# EAGLE board pcbqr_v4 (EAGLE 5.11)
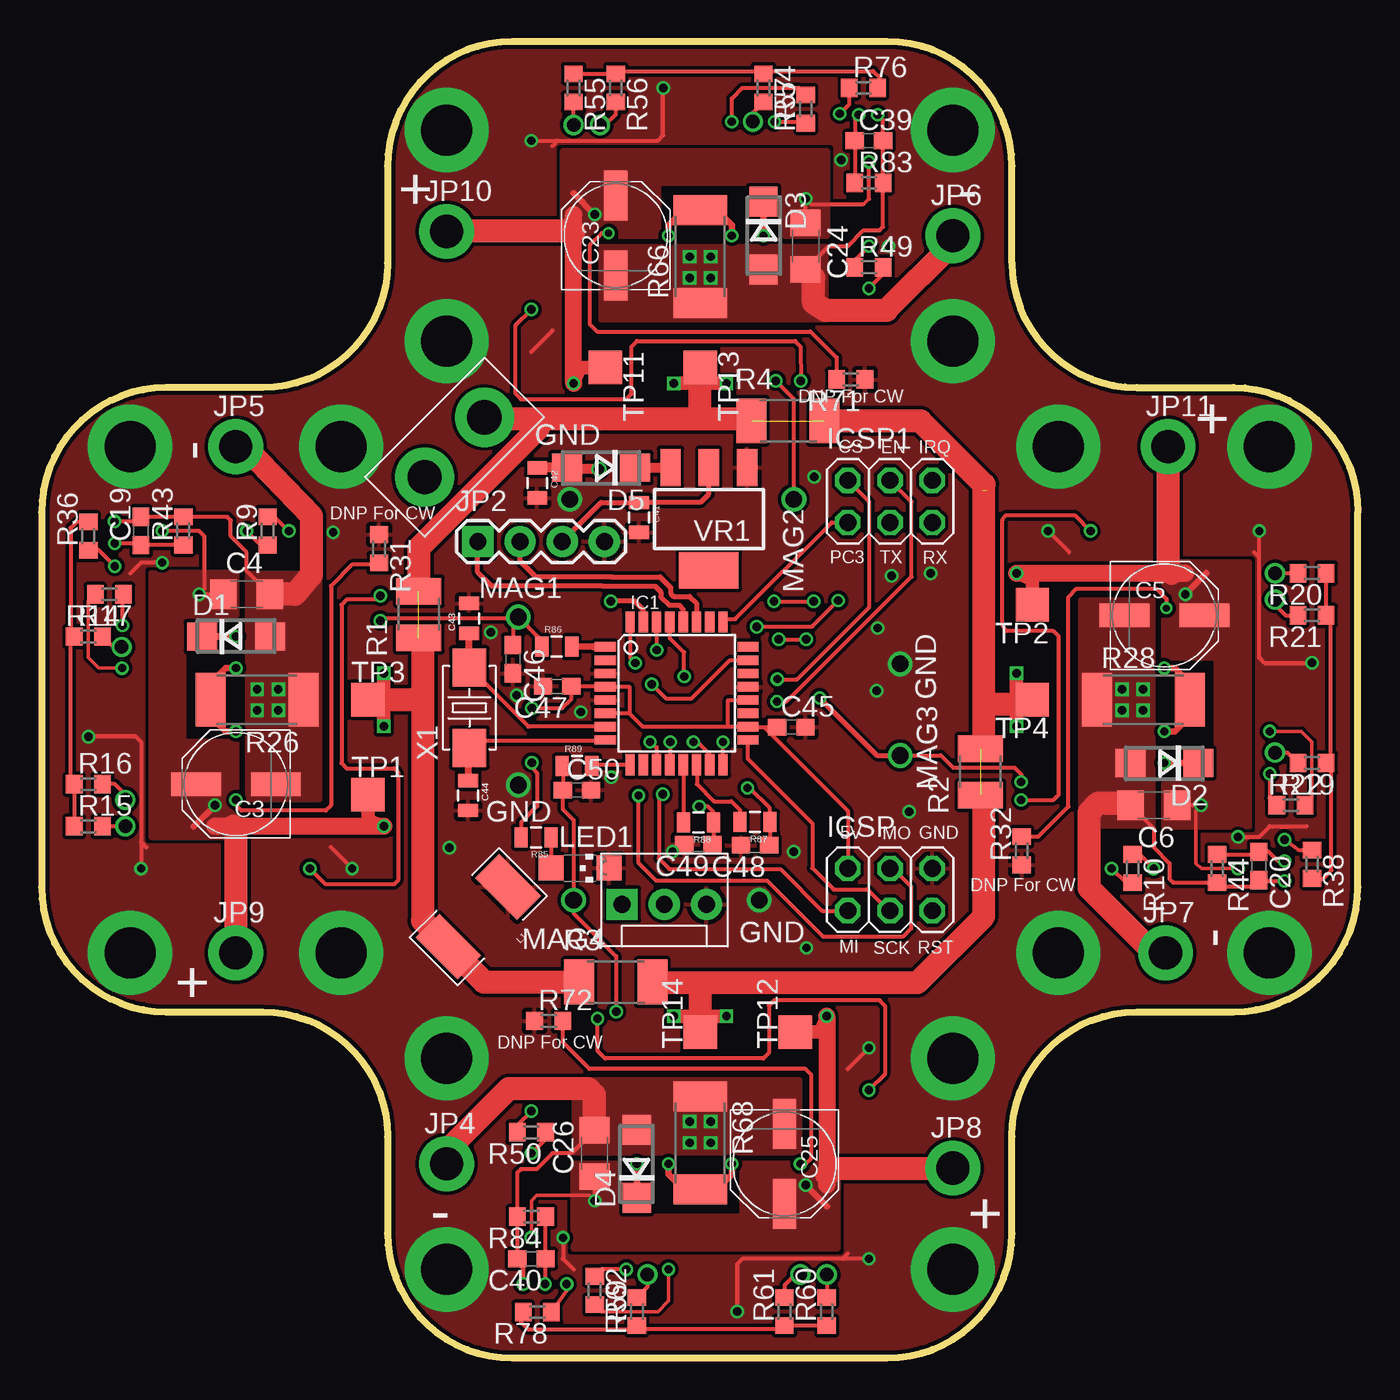
[diagram p0: board, top side]
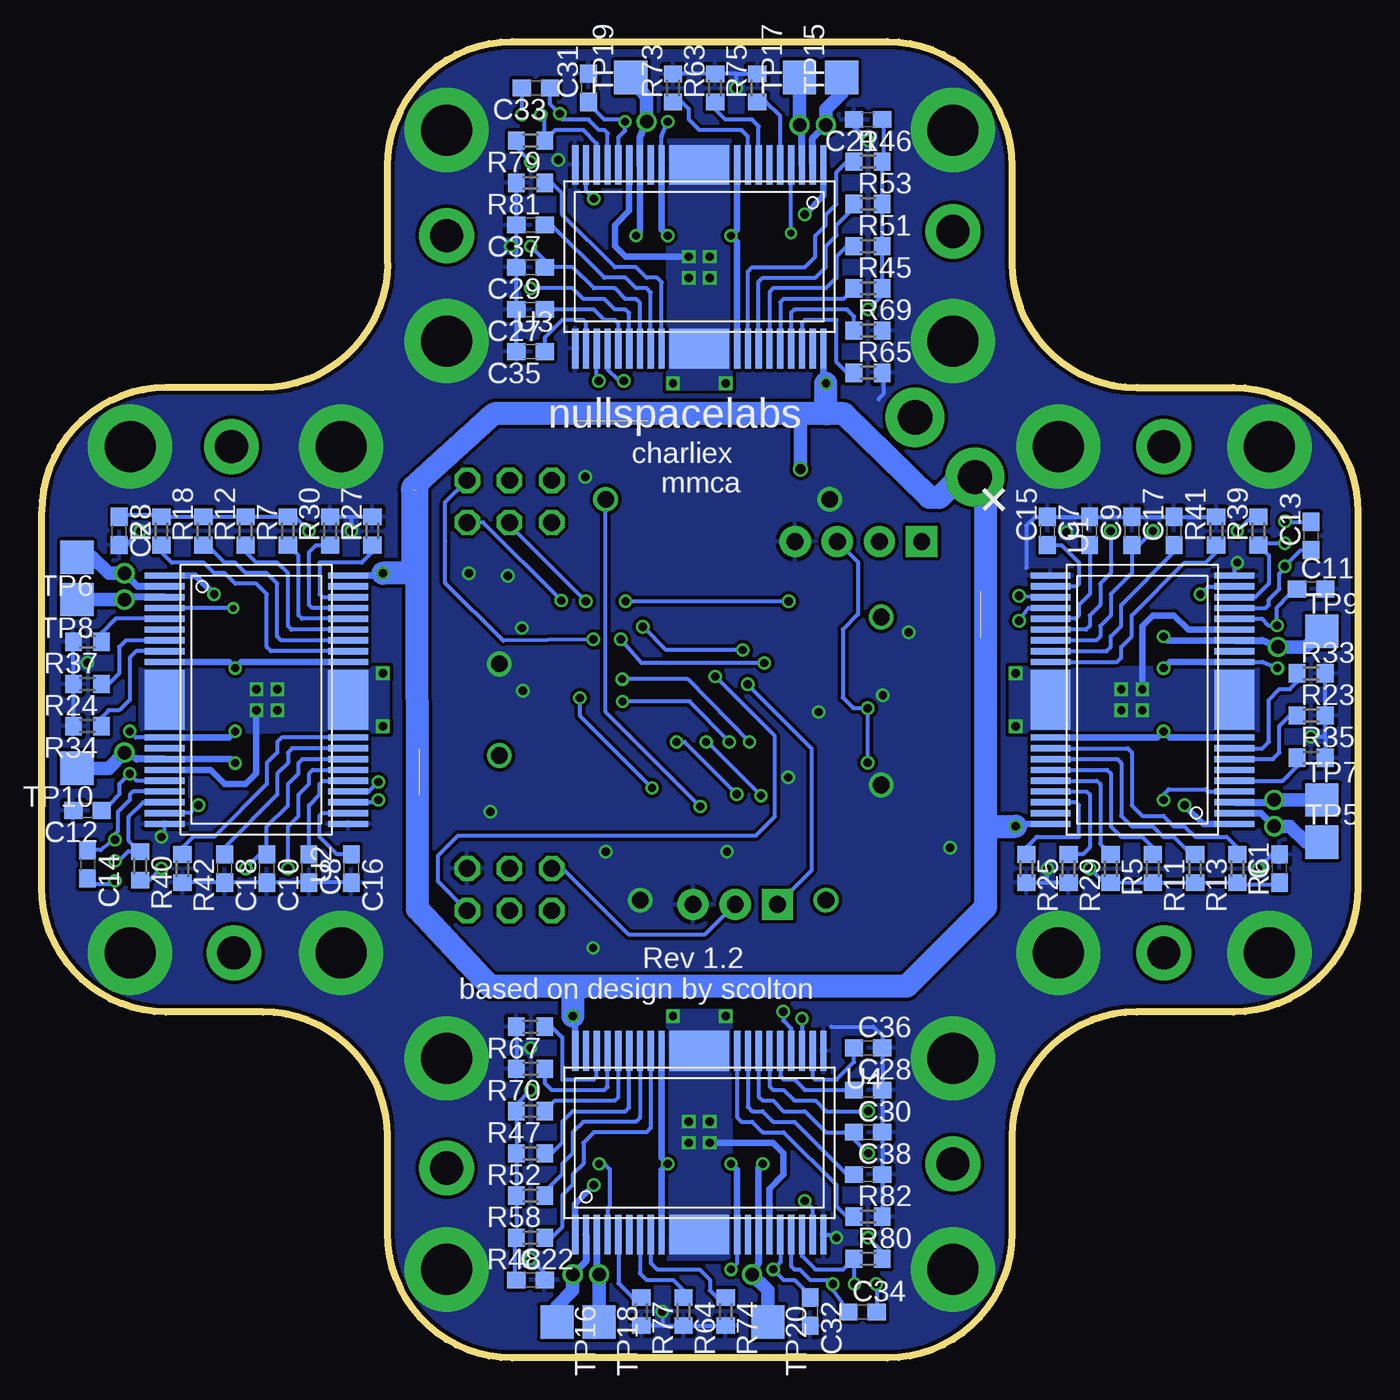
[diagram p1: board, bottom side, seen from below]

Size 79.25 x 79.25 mm. Coordinates in mm from the lower left corner, seen from the top.
Outline: 58.42,65.92 arc90 65.92,58.42 71.75,58.42 arc-90 79.25,50.92 79.25,28.33 arc-90 71.75,20.83 65.92,20.83 arc90 58.42,13.33 58.42,7.5 arc-90 50.92,0 28.33,0 arc-90 20.83,7.5 20.83,13.33 arc90 13.33,20.83 7.5,20.83 arc-90 0,28.33 0,50.92 arc-90 7.5,58.42 13.33,58.42 arc90 20.83,65.92 20.83,71.75 arc-90 28.33,79.25 50.92,79.25 arc-90 58.42,71.75 58.42,65.92
Copper layers (1*16): Top 0.035mm / dielectric 1.5mm / Bottom 0.035mm
Design rules "ITead_rule *": minimum track width 6mil, minimum drill 12mil, track to track 6mil, track to pad 6mil, pad to pad 6mil, via to via 6mil, smd to smd 0mil, copper to edge 10mil, drill to drill 10mil, minimum pad ring 10mil, minimum via ring 6mil, stop-mask expansion 2mil, vias tented up to drill 25mil, thermal gap 10mil
Net classes: 0 default: width 0.203 mm, drill 0.381 mm, clearance 0.203 mm; 1 power: width 0.254 mm, drill 0.381 mm, clearance 0.203 mm; 3 usbvcc: width 0.508 mm, drill 0.381 mm, clearance 0.203 mm

## Footprints (pad centres in the part's own frame; a part is rotated, then mirrored left to right if it is on the bottom)
C0603 = smd 1.1 x 1: 1 -0.85,0; 2 0.85,0
PANASONIC_D = smd 3 x 1.4: + 2.4,0; - -2.4,0
C1206 = smd 1.6 x 1.8: 1 -1.4,0; 2 1.4,0
0805 = smd 0.8 x 1.2: 1 -0.9,0; 2 0.9,0
SMA = smd 1.8 x 1.7: A 2.05,0; C -2.05,0
TQFP32-08 = smd 1.27 x 0.559: 1 -4.293,2.8; 2 -4.293,2; 3 -4.293,1.2; 4 -4.293,0.4; 5 -4.293,-0.4; 6 -4.293,-1.2; 7 -4.293,-2; 8 -4.293,-2.8; 17 4.293,-2.8; 18 4.293,-2; 19 4.293,-1.2; 20 4.293,-0.4; 21 4.293,0.4; 22 4.293,1.2; 23 4.293,2; 24 4.293,2.8 | smd 0.559 x 1.27: 9 -2.8,-4.293; 10 -2,-4.293; 11 -1.2,-4.293; 12 -0.4,-4.293; 13 0.4,-4.293; 14 1.2,-4.293; 15 2,-4.293; 16 2.8,-4.293; 25 2.8,4.293; 26 2,4.293; 27 1.2,4.293; 28 0.4,4.293; 29 -0.4,4.293; 30 -1.2,4.293; 31 -2,4.293; 32 -2.8,4.293
2X03 = drill 1.016 octagon: 1 -2.54,-1.27; 2 -2.54,1.27; 3 0,-1.27; 4 0,1.27; 5 2.54,-1.27; 6 2.54,1.27
1X04 = drill 1.016 pad 1.88 square: 1 0,0 | drill 1.016 pad 1.88 round: 2 2.54,0; 3 5.08,0; 4 7.62,0
MOLEX-1X3 = drill 1.016 pad 1.88 square: 1 0,0 | drill 1.016 pad 1.88 round: 2 2.54,0; 3 5.08,0
1X01_2MM = drill 2 pad 3.302 round: 1 0,0
1X02_XTRA_BIG = drill 2.057 pad 3.556 round: 1 -2.54,0; 2 2.54,0
INDUCTOR-1206 = smd 2.032 x 3.556: P$1 -2.54,0; P$2 2.54,0
CHIPLED_1206 = smd 1.5 x 1.5: A 0,-1.75; C 0,1.75
R1210 = smd 1.6 x 2.7: 1 -1.4,0; 2 1.4,0
R2010 = smd 1.8 x 2.7: 1 -2.2,0; 2 2.2,0
R0603 = smd 1 x 1.1: 1 -0.85,0; 2 0.85,0
R2512 = smd 1.8 x 3.2: 1 -2.8,0; 2 2.8,0
TP20SQ = smd 2 x 2: TP 0,0
HSOP36-P-450-0.65 = smd 0.38 x 2.4: 1 -7.475,-5.525; 2 -6.825,-5.525; 3 -6.175,-5.525; 4 -5.525,-5.525; 5 -4.875,-5.525; 6 -4.225,-5.525; 7 -3.575,-5.525; 8 -2.925,-5.525; 9 -2.275,-5.525; 10 2.275,-5.525; 11 2.925,-5.525; 12 3.575,-5.525; 13 4.225,-5.525; 14 4.875,-5.525; 15 5.525,-5.525; 16 6.175,-5.525; 17 6.825,-5.525; 18 7.475,-5.525; 19 7.475,5.525; 20 6.825,5.525; 21 6.175,5.525; 22 5.525,5.525; 23 4.875,5.525; 24 4.225,5.525; 25 3.575,5.525; 26 2.925,5.525; 27 2.275,5.525; 28 -2.275,5.525; 29 -2.925,5.525; 30 -3.575,5.525; 31 -4.225,5.525; 32 -4.875,5.525; 33 -5.525,5.525; 34 -6.175,5.525; 35 -6.825,5.525; 36 -7.475,5.525 | smd 3.6 x 2.4: P1 0,-5.525; P2 0,5.525
SOT-223 = smd 1.219 x 2.235: 1 -2.311,-3.099; 2 0,-3.099; 3 2.311,-3.099 | smd 3.6 x 2.2: 4 0,3.099
5032 = smd 2.286 x 2.032: 1 -2.413,0; 2 2.413,0

## Placement (x,y rotation side)
C1  1uF  [C0603]  4.72,29.46 90 bottom
C2  1uF  [C0603]  74.57,49.78 270 bottom
C3  68uF  [PANASONIC_D]  11.71,34.54 180 top
C4  10uF  [C1206]  12.34,45.97 0 top
C5  68uF  [PANASONIC_D]  67.59,44.7 0 top
C6  10uF  [C1206]  66.95,33.27 180 top
C7  0.1uF  [C0603]  16.15,49.78 90 bottom
C8  0.1uF  [C0603]  63.14,29.46 270 bottom
C9  1uF  [C0603]  13.61,49.78 90 bottom
C10  1uF  [C0603]  65.68,29.46 270 bottom
C11  0.1uF  [C0603]  2.82,46.29 0 bottom
C12  0.1uF  [C0603]  76.48,32.96 180 bottom
C13  DNP  [C0603]  2.82,49.48 90 bottom
C14  DNP  [C0603]  76.48,29.72 270 bottom
C15  DNP  [C0603]  18.69,49.78 90 bottom
C16  DNP  [C0603]  60.6,29.46 270 bottom
C17  100pF  [C0603]  11.07,49.78 90 bottom
C18  100pF  [C0603]  68.22,29.46 270 bottom
C19  0.1uF  [C0603]  5.99,49.78 90 top
C20  0.1uF  [C0603]  73.28,29.62 270 top
C21  1uF  [C0603]  29.49,74.55 180 bottom
C22  1uF  [C0603]  49.81,4.7 0 bottom
C23  68uF  [PANASONIC_D]  34.57,67.56 90 top
C24  10uF  [C1206]  46,66.93 270 top
C25  68uF  [PANASONIC_D]  44.73,11.68 270 top
C26  10uF  [C1206]  33.3,12.32 90 top
C27  0.1uF  [C0603]  49.81,63.12 180 bottom
C28  0.1uF  [C0603]  29.49,16.13 0 bottom
C29  1uF  [C0603]  49.81,65.66 180 bottom
C30  1uF  [C0603]  29.49,13.59 0 bottom
C31  0.1uF  [C0603]  46.32,76.45 90 bottom
C32  0.1uF  [C0603]  32.98,2.79 270 bottom
C33  DNP  [C0603]  49.48,76.45 180 bottom
C34  DNP  [C0603]  29.82,2.77 0 bottom
C35  DNP  [C0603]  49.81,60.58 180 bottom
C36  DNP  [C0603]  29.49,18.67 0 bottom
C37  100pF  [C0603]  49.81,68.2 180 bottom
C38  100pF  [C0603]  29.49,11.05 0 bottom
C39  0.1uF  [C0603]  49.81,73.28 0 top
C40  0.1uF  [C0603]  29.49,5.97 180 top
C41  10uF  [0805]  35.98,50.6 270 top
C42  10uF  [0805]  29.85,52.68 270 top
C43  18pF  [0805]  25.73,44.53 90 top
C44  18pF  [0805]  25.68,33.86 270 top
C45  0.1uF  [C0603]  45.14,37.97 0 top
C46  2.2uF  [C0603]  28.37,42.06 270 top
C47  0.1uF  [C0603]  31.04,40.44 180 top
C48  2.2uF  [C0603]  42.95,30.86 180 top
C49  2.2uF  [C0603]  39.55,30.91 180 top
C50  2.2uF  [C0603]  32.23,34.19 0 top
D1  SCHOTTKY_SMA  [SMA]  11.71,43.43 0 top
D2  SCHOTTKY_SMA  [SMA]  67.59,35.81 180 top
D3  SCHOTTKY_SMA  [SMA]  43.46,67.56 270 top
D4  SCHOTTKY_SMA  [SMA]  35.84,11.68 90 top
D5  SCHOTTKY_SMA  [SMA]  33.68,53.59 180 top
IC1  MEGA8-AI  [TQFP32-08]  38.23,40.01 0 top
ICSP  ICSP  [2X03]  51.08,28.19 0 top
ICSP1  ICSP  [2X03]  51.08,51.56 0 top
JP2  IMU  [1X04]  26.26,49.15 0 top
JP3  range  [MOLEX-1X3]  34.95,27.3 0 top
JP4  M01PTH_2MM  [1X01_2MM]  24.38,11.68 0 top
JP5  M01PTH_2MM  [1X01_2MM]  11.68,54.86 0 top
JP6  M01PTH_2MM  [1X01_2MM]  54.86,67.56 0 top
JP7  M01PTH_2MM  [1X01_2MM]  67.67,24.38 0 top
JP8  M01PTH_2MM  [1X01_2MM]  54.86,11.43 0 top
JP9  M01PTH_2MM  [1X01_2MM]  11.68,24.38 0 top
JP10  M01PTH_2MM  [1X01_2MM]  24.38,67.82 0 top
JP11  M01PTH_2MM  [1X01_2MM]  67.82,54.86 0 top
JP12  [1X02_XTRA_BIG]  24.86,54.83 225 top
L1  HF70ACC321611-T  [INDUCTOR-1206]  26.29,26.56 225 top
LED1  [CHIPLED_1206]  32.41,29.49 270 top
R1  0R  [R1210]  22.71,44.75 90 top
R2  0R  [R1210]  56.52,35.28 90 top
R3  0R  [R2010]  34.57,22.63 0 top
R4  0R  [R2010]  44.93,56.41 0 top
R5  DNP  [R0603]  14.88,29.46 270 bottom
R6  10k  [R0603]  7.26,29.46 270 bottom
R7  DNP  [R0603]  64.41,49.78 90 bottom
R8  10k  [R0603]  72.03,49.78 90 bottom
R9  240k  [R0603]  13.61,49.78 90 top
R10  240k  [R0603]  65.68,29.46 270 top
R11  0  [R0603]  12.34,29.46 270 bottom
R12  0  [R0603]  66.95,49.78 90 bottom
R13  0  [R0603]  9.8,29.46 270 bottom
R14  10k  [R0603]  4.09,45.97 180 top
R15  10k  [R0603]  2.82,32 0 top
R16  10k  [R0603]  2.82,34.54 0 top
R17  10k  [R0603]  2.82,43.43 0 top
R18  0  [R0603]  69.49,49.78 90 bottom
R19  10k  [R0603]  75.21,33.27 0 top
R20  10k  [R0603]  76.48,47.24 180 top
R21  10k  [R0603]  76.48,44.7 180 top
R22  10k  [R0603]  76.48,35.81 180 top
R23  DNP  [R0603]  2.82,38.67 0 bottom
R24  DNP  [R0603]  76.48,40.58 180 bottom
R25  0  [R0603]  19.96,29.46 270 bottom
R26  0.2, 2W  [R2512]  12.98,39.62 180 top
R27  0  [R0603]  59.33,49.78 90 bottom
R28  0.2, 2W  [R2512]  66.32,39.62 0 top
R29  0  [R0603]  17.42,29.46 270 bottom
R30  0  [R0603]  61.87,49.78 90 bottom
R31  0  [R0603]  20.32,48.72 270 top
R32  0  [R0603]  59,30.53 90 top
R33  DNP  [R0603]  2.82,41.21 0 bottom
R34  DNP  [R0603]  76.48,38.04 180 bottom
R35  0  [R0603]  2.82,36.13 0 bottom
R36  0  [R0603]  2.82,49.48 90 top
R37  0  [R0603]  76.48,43.12 180 bottom
R38  0  [R0603]  76.48,29.72 270 top
R39  10k  [R0603]  5.99,49.78 90 bottom
R40  10k  [R0603]  73.3,29.62 270 bottom
R41  10k  [R0603]  8.53,49.78 90 bottom
R42  10k  [R0603]  70.76,29.46 270 bottom
R43  10k  [R0603]  8.53,49.78 90 top
R44  10k  [R0603]  70.76,29.46 270 top
R45  DNP  [R0603]  29.49,64.39 0 bottom
R46  10k  [R0603]  29.49,72.01 0 bottom
R47  DNP  [R0603]  49.81,14.86 180 bottom
R48  10k  [R0603]  49.81,7.24 180 bottom
R49  240k  [R0603]  49.81,65.66 0 top
R50  240k  [R0603]  29.49,13.59 180 top
R51  0  [R0603]  29.49,66.93 0 bottom
R52  0  [R0603]  49.81,12.32 180 bottom
R53  0  [R0603]  29.49,69.47 0 bottom
R54  10k  [R0603]  46,75.18 90 top
R55  10k  [R0603]  32.03,76.45 270 top
R56  10k  [R0603]  34.57,76.45 270 top
R57  10k  [R0603]  43.46,76.45 270 top
R58  0  [R0603]  49.81,9.78 180 bottom
R59  10k  [R0603]  33.3,4.06 270 top
R60  10k  [R0603]  47.27,2.79 90 top
R61  10k  [R0603]  44.73,2.79 90 top
R62  10k  [R0603]  35.84,2.79 90 top
R63  DNP  [R0603]  38.7,76.45 90 bottom
R64  DNP  [R0603]  40.6,2.79 270 bottom
R65  0  [R0603]  29.49,59.31 0 bottom
R66  0.2, 2W  [R2512]  39.65,66.29 90 top
R67  0  [R0603]  49.81,19.94 180 bottom
R68  0.2, 2W  [R2512]  39.65,12.95 270 top
R69  0  [R0603]  29.49,61.85 0 bottom
R70  0  [R0603]  49.81,17.4 180 bottom
R71  0  [R0603]  48.72,58.9 180 top
R72  0  [R0603]  30.53,20.29 0 top
R73  DNP  [R0603]  41.24,76.45 90 bottom
R74  DNP  [R0603]  38.06,2.79 270 bottom
R75  0  [R0603]  36.16,76.45 90 bottom
R76  0  [R0603]  49.48,76.45 0 top
R77  0  [R0603]  43.14,2.79 270 bottom
R78  0  [R0603]  29.85,2.77 180 top
R79  10k  [R0603]  49.81,73.28 180 bottom
R80  10k  [R0603]  29.49,5.97 0 bottom
R81  10k  [R0603]  49.81,70.74 180 bottom
R82  10k  [R0603]  29.49,8.51 0 bottom
R83  10k  [R0603]  49.81,70.74 0 top
R84  10k  [R0603]  29.49,8.51 180 top
R85  [0805]  29.77,31.34 180 top
R86  3k  [0805]  31.01,42.82 0 top
R87  3k  [0805]  42.95,32.26 180 top
R88  3k  [0805]  39.55,32.23 180 top
R89  3k  [0805]  32.23,35.64 0 top
TP1  TPTP20SQ  [TP20SQ]  19.65,33.91 0 top
TP2  TPTP20SQ  [TP20SQ]  59.65,45.34 180 top
TP3  TPTP20SQ  [TP20SQ]  19.65,39.62 0 top
TP4  TPTP20SQ  [TP20SQ]  59.65,39.62 180 top
TP5  TPTP20SQ  [TP20SQ]  2.18,31.05 0 bottom
TP6  TPTP20SQ  [TP20SQ]  77.11,48.2 180 bottom
TP7  TPTP20SQ  [TP20SQ]  2.18,33.59 0 bottom
TP8  TPTP20SQ  [TP20SQ]  77.11,45.66 180 bottom
TP9  TPTP20SQ  [TP20SQ]  2.18,43.75 0 bottom
TP10  TPTP20SQ  [TP20SQ]  77.11,35.5 180 bottom
TP11  TPTP20SQ  [TP20SQ]  33.93,59.63 270 top
TP12  TPTP20SQ  [TP20SQ]  45.36,19.62 90 top
TP13  TPTP20SQ  [TP20SQ]  39.65,59.63 270 top
TP14  TPTP20SQ  [TP20SQ]  39.65,19.62 90 top
TP15  TPTP20SQ  [TP20SQ]  31.08,77.09 90 bottom
TP16  TPTP20SQ  [TP20SQ]  48.22,2.16 270 bottom
TP17  TPTP20SQ  [TP20SQ]  33.62,77.09 90 bottom
TP18  TPTP20SQ  [TP20SQ]  45.68,2.16 270 bottom
TP19  TPTP20SQ  [TP20SQ]  43.78,77.09 90 bottom
TP20  TPTP20SQ  [TP20SQ]  35.52,2.16 270 bottom
U1  TB6588FG  [HSOP36-P-450-0.65]  12.98,39.62 90 bottom
U2  TB6588FG  [HSOP36-P-450-0.65]  66.32,39.62 270 bottom
U3  TB6588FG  [HSOP36-P-450-0.65]  39.65,66.29 180 bottom
U4  TB6588FG  [HSOP36-P-450-0.65]  39.65,12.95 0 bottom
VR1  NCP1117ST50T3G  [SOT-223]  40.17,50.51 180 top
X1  16Mhz  [5032]  25.76,39.14 90 top

## Library data of the parts
C1-C40 C45-C50 R1-R84 = rcl
C41 C42 JP2-JP12 L1 R85-R89 = SparkFun
C43 C44 = slice_noshift
D1-D5 U1-U4 VR1 = sc_usercreated
IC1 = atmel; MPN: ATMEGA8-16AU; OC_FARNELL: 9171371; OC_NEWARK: 73M8863
ICSP ICSP1 = pinhead
LED1 = led
TP1-TP20 = testpad
X1 = NSL_MiniQuad

## Nets
5V: C41.1 C45.1 C47.1 IC1.4 IC1.6 IC1.18 IC1.20 ICSP.2 JP2.3 JP3.2 R85.2 VR1.2
CS: IC1.11 ICSP1.2
DIR1: R31.2 U1.4
DIR2: R71.2 U3.4
DIR3: R32.2 U2.4
DIR4: R72.2 U4.4
GND: C1.2 C2.2 C7.2 C8.2 C9.2 C10.2 C11.2 C12.2 C15.2 C16.2 C17.2 C18.2 C21.2 C22.2 C27.2 C28.2 C29.2 C30.2 C31.2 C32.2 C35.2 C36.2 C37.2 C38.2 C41.2 C42.2 C43.2 C44.2 C45.2 C46.2 C47.2 C48.2 C49.2 C50.2 IC1.3 IC1.5 IC1.21 ICSP.6 JP2.4 JP3.3 L1.P$1 LED1.C R23.2 R24.2 R25.2 R27.2 R29.2 R30.2 R31.1 R32.1 R33.2 R34.2 R35.2 R37.2 R41.2 R42.2 R63.2 R64.2 R65.2 R67.2 R69.2 R70.2 R71.1 R72.1 R73.2 R74.2 R75.2 R77.2 R81.2 R82.2 U1.18 U1.19 U2.18 U2.19 U3.18 U3.19 U4.18 U4.19 VR1.1
MAG1: IC1.1 R86.2
MAG1A: C46.1 R86.1 U1.22
MAG2: IC1.13 R88.2
MAG2A: C49.1 R88.1 U3.22
MAG3: IC1.14 R87.2
MAG3A: C48.1 R87.1 U2.22
MAG4: IC1.9 R89.2
MAG4A: C50.1 R89.1 U4.22
MISO: IC1.16 ICSP.1
MOSI: IC1.15 ICSP.4
N$1: LED1.A R85.1
N$2: C43.1 IC1.7 X1.2
N$3: R15.1 R16.1 R17.1 R36.2
N$4: R14.2 R26.2 U1.9 U1.10 U1.28
N$5: R15.2 TP5.TP U1.2
N$6: R16.2 TP7.TP U1.3
N$7: D1.C R17.2 TP9.TP U1.12
N$8: R35.1 U1.5
N$9: R33.1 U1.8
N$10: R9.2 U1.24
N$11: R29.1 U1.33
N$12: R25.1 U1.34
N$13: R23.1 U1.7
N$14: C17.1 U1.26
N$15: R41.1 U1.27
N$16: R13.1 U1.30
N$17: R11.1 U1.31
N$18: C9.1 R9.1 U1.25
N$19: R5.1 U1.32
N$20: C7.1 U1.23
N$21: R6.1 U1.29
N$22: C19.1 R39.1 R43.1 U1.16
N$23: R54.2 R66.2 U3.9 U3.10 U3.28
N$24: C13.1 R36.1 U1.15
N$25: C11.1 R14.1 U1.14
N$26: C15.1 U1.20
N$27: R55.2 TP15.TP U3.2
N$28: R56.2 TP17.TP U3.3
N$29: D3.C R57.2 TP19.TP U3.12
N$30: R75.1 U3.5
N$31: R73.1 U3.8
N$32: R69.1 U3.33
N$33: R65.1 U3.34
N$34: R63.1 U3.7
N$35: C37.1 U3.26
N$36: R81.1 U3.27
N$37: R53.1 U3.30
N$38: R51.1 U3.31
N$39: R49.2 U3.24
N$40: C29.1 R49.1 U3.25
N$41: C27.1 U3.23
N$42: R45.1 U3.32
N$43: R46.1 U3.29
N$44: R55.1 R56.1 R57.1 R76.2
N$45: C33.1 R76.1 U3.15
N$46: C31.1 R54.1 U3.14
N$47: C39.1 R79.1 R83.1 U3.16
N$48: C35.1 U3.20
N$49: R19.2 R28.2 U2.9 U2.10 U2.28
N$50: R20.2 TP6.TP U2.2
N$51: R21.2 TP8.TP U2.3
N$52: D2.C R22.2 TP10.TP U2.12
N$53: R37.1 U2.5
N$54: R34.1 U2.8
N$55: R30.1 U2.33
N$56: R27.1 U2.34
N$57: R24.1 U2.7
N$58: C18.1 U2.26
N$59: R42.1 U2.27
N$60: R18.1 U2.30
N$61: R12.1 U2.31
N$62: R10.2 U2.24
N$63: C10.1 R10.1 U2.25
N$64: C8.1 U2.23
N$65: R7.1 U2.32
N$66: R8.1 U2.29
N$67: R20.1 R21.1 R22.1 R38.2
N$68: C14.1 R38.1 U2.15
N$69: C12.1 R19.1 U2.14
N$70: C20.1 R40.1 R44.1 U2.16
N$71: C16.1 U2.20
N$72: R59.2 R68.2 U4.9 U4.10 U4.28
N$73: R60.2 TP16.TP U4.2
N$74: R61.2 TP18.TP U4.3
N$75: D4.C R62.2 TP20.TP U4.12
N$76: R77.1 U4.5
N$77: R74.1 U4.8
N$78: R70.1 U4.33
N$79: R67.1 U4.34
N$80: R64.1 U4.7
N$81: C38.1 U4.26
N$82: R82.1 U4.27
N$83: R58.1 U4.30
N$84: R52.1 U4.31
N$85: R50.2 U4.24
N$86: C30.1 R50.1 U4.25
N$87: C28.1 U4.23
N$88: R47.1 U4.32
N$89: R48.1 U4.29
N$90: R60.1 R61.1 R62.1 R78.2
N$91: C34.1 R78.1 U4.15
N$92: C32.1 R59.1 U4.14
N$93: C40.1 R80.1 R84.1 U4.16
N$94: C36.1 U4.20
N$95: C44.1 IC1.8 X1.1
N$96: D5.C VR1.3
PC3: IC1.25 ICSP1.1
RANGE: IC1.23 JP3.1
RST: IC1.29 ICSP.5
RX: IC1.30 ICSP1.5
SCK: IC1.17 ICSP.3
SCL_MCU: IC1.28 JP2.1
SDA_MCU: IC1.27 JP2.2
TX: IC1.31 ICSP1.3
V+: C3.+ C4.1 C5.+ C6.1 C23.+ C24.1 C25.+ C26.1 C42.1 D5.A JP8.1 JP9.1 JP10.1 JP11.1 JP12.2 R39.2 R40.2 R79.2 R80.2 TP1.TP TP2.TP TP11.TP TP12.TP U1.1 U1.17 U1.36 U2.1 U2.17 U2.36 U3.1 U3.17 U3.36 U4.1 U4.17 U4.36
V-: C3.- C4.2 C5.- C6.2 C13.2 C14.2 C19.2 C20.2 C23.- C24.2 C25.- C26.2 C33.2 C34.2 C39.2 C40.2 D1.A D2.A D3.A D4.A JP4.1 JP5.1 JP6.1 JP7.1 JP12.1 L1.P$2 R1.1 R1.2 R2.1 R2.2 R3.1 R3.2 R4.1 R4.2 R26.1 R28.1 R43.2 R44.2 R66.1 R68.1 R83.2 R84.2 TP3.TP TP4.TP TP13.TP TP14.TP U1.13 U1.P1 U1.P2 U2.13 U2.P1 U2.P2 U3.13 U3.P1 U3.P2 U4.13 U4.P1 U4.P2
VR1: C1.1 R5.2 R6.2 R11.2 R13.2 U1.21
VR2: C21.1 R45.2 R46.2 R51.2 R53.2 U3.21
VR3: C2.1 R7.2 R8.2 R12.2 R18.2 U2.21
VR4: C22.1 R47.2 R48.2 R52.2 R58.2 U4.21
WIFI_EN: IC1.12 ICSP1.4
WIFI_IRQ: IC1.32 ICSP1.6

## Tracks (layer width: path | path; a pad name or v marks a point on that pad's centre or on a via)
5V  (via drill 0.5)
  Top 0.254: R85.2 28.87,32.25 29.85,33.22 29.85,35.2 29.52,35.54 v29.52,35.84 | 35.38,38.81 35.38,40.39 35.36,40.41 IC1.4 33.9,40.44 C47.1 31.9,40.42 31.9,39.68 31.34,39.12 v29.52,39.12 | 35.38,38.81 35.38,38.8 IC1.6 35.38,38.81 | 35.38,38.81 36.19,38.01 41.33,38.01 | 41.33,38.01 IC1.18 42.55,37.97 43.48,37.97 | IC1.20 42.51,39.6 41.35,39.6 41.33,39.57 41.33,38.01 | 43.48,37.97 48.54,32.92 ICSP.2 | 43.48,37.97 C45.1
  Top 0.305: JP2.3 33.69,51.5 C41.1 36.02,51.54 39.7,51.54 40.17,52.01 VR1.2
  Bottom 0.254: JP2.3 30.1,47.9 30.1,44.78 31.01,43.87 31.01,39.75 30.38,39.12 v29.52,39.12 v29.52,35.84 | JP3.2 39.29,25.5 43.92,25.5 47.88,29.46 ICSP.2
  Bottom 0.305: ICSP.2 48.54,29.62
CS  (via drill 0.5)
  Top 0.254: ICSP1.2 49.84,51.54 49.84,45.21 45.47,40.84 44.32,40.84 v44.3,40.87 | v36.63,37.08 37.03,36.76 IC1.11
  Bottom 0.254: v44.3,40.87 40.34,40.87 v36.63,37.08
DIR1  (via drill 0.5)
  Top 0.254: v11.71,33.59 11.71,33.27 12.03,32.96 17.11,32.96 17.42,33.27 17.42,46.48 18.69,47.75 20.26,47.75 R31.2
  Bottom 0.254: U1.4 9.04,34.1 9.17,34.23 11.39,34.23 11.71,33.91 v11.71,33.59
DIR2  (via drill 0.41)
  Top 0.254: v34.14,67.72 33.73,67.72 33.02,67 33.02,62.2 33.43,61.8 46.28,61.8 47.85,60.22 47.85,58.92 R71.2
  Bottom 0.254: U3.4 34.14,71.81 v34.14,67.72
DIR3  (via drill 0.41)
  Top 0.254: v67.72,45.14 67.72,45.7 67.11,46.3 62.31,46.3 61.82,45.82 61.82,33.2 60.01,31.38 R32.2
  Bottom 0.254: U2.4 71.83,45.16 71.81,45.14 v67.72,45.14
DIR4  (via drill 0.5)
  Top 0.254: v45.68,11.68 46,11.68 46.32,12 46.32,17.08 46,17.4 32.98,17.4 31.38,19 R72.2
  Bottom 0.254: U4.4 45.17,9.02 45.05,9.14 45.05,11.37 45.36,11.68 v45.68,11.68
GND  (via drill 0.5, 1, 3.05 pad 5.08)
  Top 0.254: v7.26,47.88 5.99,47.88 5.36,47.24 | 5.99,31.05 6.31,30.73 | 5.99,31.05 5.99,37.08 5.68,37.4 v2.82,37.4 | v18.69,29.46 17.42,30.73 | 5.99,31.05 v5.99,29.46 | 31.08,73.28 30.76,72.96 | 31.08,73.28 37.11,73.28 37.43,73.6 v37.43,76.45 | 30.76,61.85 29.49,60.58 | v29.49,73.28 31.08,73.28 | v72.03,31.37 73.3,31.37 73.94,32 76.16,32 | 73.3,48.2 72.99,48.51 | 73.3,48.2 73.3,42.16 73.62,41.85 v76.48,41.85 | v60.6,49.78 61.87,48.51 | 73.3,48.2 v73.3,49.78 | v31.39,7.24 31.39,5.97 32.03,5.33 | 48.22,5.97 48.54,6.29 | 48.22,5.97 42.19,5.97 41.87,5.65 v41.87,2.79 | v49.81,18.67 48.54,17.4 | v49.81,5.97 48.22,5.97
  Bottom 0.254: R33.2 R23.2 1.97,37.4 | 1.97,37.4 R35.2 | R41.2 C17.2 C9.2 C7.2 C15.2 19.43,50.63 19.96,50.1 19.96,47.56 | 18.69,28.61 R29.2 17,28.61 | R25.2 18.69,28.61 | U1.18 7.45,47.69 v7.26,47.88 | C11.2 1.97,46.71 | v2.82,37.4 1.97,37.4 | 18.69,28.61 v18.69,29.46 | 19.5,47.1 U1.19 | C1.2 5.14,30.31 v5.99,29.46 | R73.2 R63.2 37.43,77.3 | 37.43,77.3 R75.2 | C35.2 C27.2 C29.2 C37.2 R81.2 | R69.2 28.64,62.27 | v37.43,76.45 37.43,77.3 | 28.54,59.31 28.54,58.04 28.85,57.72 | C21.2 30.34,74.13 v29.49,73.28 | R34.2 R24.2 77.33,41.85 | 77.33,41.85 R37.2 | C16.2 C8.2 C10.2 C18.2 R42.2 | 60.6,50.63 R30.2 62.29,50.63 | R27.2 60.6,50.63 | U2.18 71.84,31.56 v72.03,31.37 | C12.2 77.33,32.54 | v76.48,41.85 77.33,41.85 | 60.6,50.63 v60.6,49.78 | C2.2 74.15,48.93 v73.3,49.78 | R74.2 R64.2 41.87,1.94 | 41.87,1.94 R77.2 | R82.2 C38.2 C30.2 C28.2 C36.2 28.64,19.41 29.17,19.94 31.71,19.94 | 50.66,18.67 R70.2 50.66,16.98 | R67.2 50.66,18.67 | U4.18 31.58,7.43 v31.39,7.24 | C32.2 32.56,1.94 | v41.87,2.79 41.87,1.94 | 50.66,18.67 v49.81,18.67 | 32.17,19.48 U4.19 | C22.2 48.96,5.12 v49.81,5.97
  other vias: 48.13,72.11 51,66.93 28.6,39.9 27.05,43.69 46.51,53.04 34.29,34.95 52.24,32.89 24.55,30.71 50.28,40.16 45.29,30.48 51.18,47.09 53.52,47.24 50.34,43.94 24.38,18.03 18.03,24.38 5.33,24.38 5.33,54.86 18.03,54.86 24.38,61.21 24.38,73.91 54.86,73.91 54.86,61.21 73.91,54.86 61.21,54.86 73.91,24.38 61.21,24.38 54.86,18.03 54.86,5.33 24.38,5.33 31.8,51.69 28.7,34.49 51.69,41.78 43.21,27.56 46.05,24.69 32.46,38.89 37.99,30.48 17.55,49.71
  pour Bottom (rank 2): 0.28,78.74 0.28,0.51 arc90 0.53,0.25 78.13,0.25 arc90 79.3,0.51 79.3,78.99 0.53,78.99 arc90
  pour Top (rank 2): 0.28,0.25 0.28,78.99 79.25,78.99 79.25,0.25
MAG1
  Top 0.406: R86.2 33.18,42.8 IC1.1
MAG1A  (via drill 0.5, 1)
  Top 0.254: 20.69,44.48 v20.4,44.39 20.74,44.53 27.92,44.53 28.63,44.53 | 28.63,44.53 arc90 v28.7,44.6 29.92,43.38 R86.1 | 28.63,44.53 28.37,44.27 C46.1
  Bottom 0.254: U1.22 19.84,45.15 v20.4,44.39
MAG2
  Top 0.254: IC1.13 38.65,35.69 R88.2
MAG2A  (via drill 0.5, 1)
  Top 0.254: v44.2,58.83 45.29,57.73 v45.29,51.69 | C49.1 40.45,30.96 R88.1 40.44,32.87 40.11,33.2 v39.6,33.2
  Bottom 0.254: U3.22 45.16,60.76 45.16,59.51 44.48,58.83 v44.2,58.83 | v39.6,33.2 45.29,38.89 v45.29,51.69
MAG3
  Top 0.254: IC1.14 39.45,35.69 39.45,34.54 40.49,33.5 41.53,33.5 42.05,32.98 R87.2
MAG3A  (via drill 0.5, 1)
  Top 0.254: C48.1 43.85,30.91 R87.1 43.84,32.27 43.84,33.1 42.62,34.32 v42.49,34.32 | v58.98,34.67 58.98,35.13 58.57,35.54 54.86,35.54 54.13,36.27 v51.69,36.27
  Top 0.305: v46.84,39.73 50.29,36.27 v51.69,36.27
  Bottom 0.254: U2.22 59.55,34.1 v58.98,34.67 | v42.49,34.32 46.84,38.66 v46.84,39.73
MAG4
  Top 0.254: R89.2 33.21,35.71 IC1.9
MAG4A  (via drill 0.5, 1)
  Top 0.254: R89.1 31.38,35.59 C50.1 31.37,34.18 31.37,33.05 32.03,32.39 v32.03,27.56 32.03,26.75 34.59,24.18 v34.59,20.85
  Bottom 0.254: v34.59,20.85 34.59,20.32 34.12,19.85 U4.22
MISO  (via drill 0.5)
  Top 0.254: ICSP.1 46.99,26.92 44.48,29.44 38.3,29.44 37.8,29.44 37.16,30.07 37.16,33.71 v37.39,33.93 | v41.02,37.08 v41.03,37.08 IC1.16
  Bottom 0.254: v41.02,37.08 40.54,37.08 v37.39,33.93
MOSI  (via drill 0.5)
  Top 0.254: ICSP.4 51.26,29.46 52.35,28.37 52.35,25.86 51.84,25.35 47.07,25.35 43.69,28.73 37.01,28.73 35.94,29.79 v35.94,33.86 | v39.24,37.08 39.5,37.08 40.21,36.37 40.21,35.73 IC1.15
  Bottom 0.254: 35.97,33.86 v35.94,33.86 39.17,37.08 v39.24,37.08
N$1
  Top 0.254: LED1.A R85.1
N$2
  Top 0.254: IC1.7 29.3,38.01 X1.2
  Top 0.406: 25.76,41.38 X1.2 25.73,41.58 C43.1
N$3
  Top 0.254: R15.1 R16.1 1.97,34.76 1.73,35 1.73,43.38 1.75,43.41 1.94,43.41 R17.1 1.75,43.65 1.75,49.96 2.12,50.33 R36.2 2.6,50.42
N$4  (via drill 0.5)
  Top 0.203: v4.85,41.53 3.45,41.53 2.82,42.16 2.82,45.55 R14.2
  Top 0.381: v11.71,41.53 11.07,41.53 10.44,40.89 10.44,39.88 | v11.71,37.72 11.07,37.72 10.44,38.35
  Top 0.406: 10.44,39.88 R26.2 10.44,39.36 10.44,38.35
  Bottom 0.254: U1.10 5.73,41.9 v4.85,41.53
  Bottom 0.381: U1.10 11.34,41.9 v11.71,41.53 | U1.9 11.34,37.35 v11.71,37.72 12.08,37.35 U1.28
N$5  (via drill 0.81)
  Top 0.254: v5.04,32 R15.2
  Bottom 0.406: U1.2 5.84,32.8 v5.04,32
  Bottom 0.813: TP5.TP 3.14,31.05 4.09,32 v5.04,32
N$6  (via drill 0.81)
  Top 0.254: v5.04,33.59 5.04,33.91 4.41,34.54 R16.2
  Bottom 0.406: U1.3 5.18,33.45 v5.04,33.59
  Bottom 0.813: v5.04,33.59 TP7.TP
N$7  (via drill 0.5, 0.81)
  Top 0.254: v4.83,42.8 4.3,42.8 R17.2
  Top 0.381: v11.71,43.43 D1.C
  Bottom 0.381: U1.12 11.47,43.2 v11.71,43.43
  Bottom 0.406: U1.12 5.76,43.2 v4.83,42.8
  Bottom 0.813: v4.83,42.8 3.14,42.8 TP9.TP
N$8
  Bottom 0.254: U1.5 4.52,34.75 3.67,35.6 R35.1
N$9
  Bottom 0.254: U1.8 5.74,36.7 5.36,37.08 5.36,39.62 4.72,40.26 4.09,40.26 3.67,40.68 R33.1 3.67,41.31
N$10  (via drill 0.5)
  Top 0.254: v14.88,49.78 14.03,50.63 R9.2
  Bottom 0.254: U1.24 16.37,43.85 16.15,44.07 16.15,44.7 15.52,45.34 15.52,46.61 14.88,47.24 v14.88,49.78
N$11
  Bottom 0.254: U1.33 16.34,34.1 16.15,33.91 16.15,30.73 16.57,30.31 R29.1
N$12
  Bottom 0.254: U1.34 16.96,33.45 16.79,33.27 16.79,31.37 19.33,31.37 19.96,30.73 R25.1
N$13
  Bottom 0.254: U1.7 5.12,36.05 4.72,36.45 4.72,38.04 4.09,38.67 R23.1
N$14
  Bottom 0.254: U1.26 15.13,42.55 14.88,42.8 14.88,43.43 14.25,44.07 14.25,45.34 11.07,48.51 C17.1
N$15
  Bottom 0.254: U1.27 14.51,41.9 14.25,42.16 14.25,42.8 13.61,43.43 13.61,44.7 10.44,47.88 9.17,47.88 8.53,48.51 R41.1
N$16
  Bottom 0.254: U1.30 14.48,36.05 14.25,35.81 14.25,32.64 13.61,32 12.34,32 11.71,31.37 11.07,31.37 10.02,30.31 R13.1
N$17
  Bottom 0.254: U1.31 15.1,35.4 14.88,35.18 14.88,32 14.25,31.37 12.98,31.37 12.34,30.73 R11.1
N$18  (via drill 0.5)
  Top 0.254: v12.34,49.78 13.19,48.93 C9.1
  Bottom 0.254: U1.25 15.75,43.2 15.52,43.43 15.52,44.07 14.88,44.7 14.88,45.97 13.61,47.24 C9.1 13.19,48.93 v12.34,49.78
N$19
  Bottom 0.254: U1.32 15.72,34.75 15.52,34.54 15.52,30.95 R5.1
N$20
  Bottom 0.254: U1.23 16.99,44.5 16.79,44.7 16.79,45.34 16.15,45.97 C7.1
N$21
  Bottom 0.254: U1.29 13.86,36.7 13.61,36.45 13.61,33.27 12.98,32.64 11.71,32.64 11.07,32 10.44,32 9.8,31.37 7.9,31.37 7.26,30.73 R6.1
N$22  (via drill 0.5)
  Top 0.254: R43.1 C19.1 5.89,49.04 v4.41,49.04
  Bottom 0.254: U1.16 6.17,45.8 5.36,46.61 5.36,48.3 C19.1 5.89,49.04 v4.41,49.04
N$23  (via drill 0.5)
  Top 0.254: v41.55,74.42 41.55,75.82 42.19,76.45 45.58,76.45 R54.2
  Top 0.381: v41.55,67.56 41.55,68.2 40.92,68.83 39.91,68.83 | v37.74,67.56 37.74,68.2 38.38,68.83
  Top 0.406: 39.91,68.83 R66.2 39.39,68.83 38.38,68.83
  Bottom 0.254: U3.10 41.92,73.54 v41.55,74.42
  Bottom 0.381: U3.10 41.92,67.93 v41.55,67.56 | U3.9 37.37,67.93 v37.74,67.56 37.37,67.19 U3.28
N$24  (via drill 0.5)
  Top 0.254: C13.1 3.44,48.63 v4.41,47.66
  Bottom 0.254: U1.15 5.55,45.15 5.36,45.34 5.36,45.66 4.72,46.29 4.72,47.22 4.41,47.54 v4.41,47.66 3.44,48.63 C13.1
N$25  (via drill 0.5)
  Top 0.254: R14.1 4.88,45.91 v4.88,44.09
  Bottom 0.254: U1.14 5.79,44.5 5.39,44.09 v4.88,44.09 4.88,45.19 4.09,45.97 3.99,45.97 C11.1 3.67,46.39
N$26
  Bottom 0.254: U1.20 16.95,46.45 16.79,46.61 16.79,47.88 17.84,48.93 C15.1
N$27  (via drill 0.81)
  Top 0.254: v32.03,74.23 R55.2
  Bottom 0.406: U3.2 32.82,73.44 v32.03,74.23
  Bottom 0.813: TP15.TP 31.08,76.14 32.03,75.18 v32.03,74.23
N$28  (via drill 0.81)
  Top 0.254: v33.62,74.23 33.93,74.23 34.57,74.87 R56.2
  Bottom 0.406: U3.3 33.47,74.09 v33.62,74.23
  Bottom 0.813: v33.62,74.23 TP17.TP
N$29  (via drill 0.5, 0.81)
  Top 0.254: v42.82,74.42 42.82,74.97 R57.2
  Top 0.381: D3.C v43.46,67.56
  Bottom 0.381: U3.12 43.22,67.8 v43.46,67.56
  Bottom 0.406: U3.12 43.22,73.51 v42.82,74.42
  Bottom 0.813: v42.82,74.42 42.82,75.88 TP19.TP
N$30
  Bottom 0.254: U3.5 34.77,74.75 35.62,75.6 R75.1
N$31
  Bottom 0.254: U3.8 36.72,73.53 37.11,73.91 39.65,73.91 40.28,74.55 40.28,75.18 40.7,75.6 R73.1 41.34,75.6
N$32
  Bottom 0.254: U3.33 34.12,62.93 33.93,63.12 30.76,63.12 30.34,62.7 R69.1
N$33
  Bottom 0.254: U3.34 33.47,62.31 33.3,62.48 31.39,62.48 31.39,59.94 30.76,59.31 R65.1
N$34
  Bottom 0.254: U3.7 36.07,74.15 36.47,74.55 38.06,74.55 38.7,75.18 R63.1
N$35
  Bottom 0.254: U3.26 42.57,64.14 42.82,64.39 43.46,64.39 44.09,65.02 45.36,65.02 48.54,68.2 C37.1
N$36
  Bottom 0.254: U3.27 41.92,64.76 42.19,65.02 42.82,65.02 43.46,65.66 44.73,65.66 47.9,68.83 47.9,70.1 48.54,70.74 R81.1
N$37
  Bottom 0.254: U3.30 36.07,64.79 35.84,65.02 32.66,65.02 32.03,65.66 32.03,66.93 31.39,67.56 31.39,68.2 30.34,69.25 R53.1
N$38
  Bottom 0.254: U3.31 35.42,64.17 35.2,64.39 32.03,64.39 31.39,65.02 31.39,66.29 30.76,66.93 R51.1
N$39  (via drill 0.5)
  Top 0.254: v49.81,64.39 50.66,65.24 R49.2
  Bottom 0.254: U3.24 43.87,62.9 44.09,63.12 44.73,63.12 45.36,63.75 46.63,63.75 47.27,64.39 v49.81,64.39
N$40  (via drill 0.5)
  Top 0.254: v49.81,66.93 48.96,66.08 C29.1
  Bottom 0.254: U3.25 43.22,63.52 43.46,63.75 44.09,63.75 44.73,64.39 46,64.39 47.27,65.66 C29.1 48.96,66.08 v49.81,66.93
N$41
  Bottom 0.254: U3.23 44.52,62.28 44.73,62.48 45.36,62.48 46,63.12 C27.1
N$42
  Bottom 0.254: U3.32 34.77,63.55 34.57,63.75 30.97,63.75 R45.1
N$43
  Bottom 0.254: U3.29 36.72,65.41 36.47,65.66 33.3,65.66 32.66,66.29 32.66,67.56 32.03,68.2 32.03,68.83 31.39,69.47 31.39,71.37 30.76,72.01 R46.1
N$44
  Top 0.254: R55.1 R56.1 34.73,77.47 43.05,77.47 43.22,77.3 R57.1 arc-90 43.62,77.47 50.06,77.47 50.44,77.09 50.44,76.67 R76.2
N$45  (via drill 0.5)
  Top 0.254: C33.1 48.62,76.44 | C33.1 48.59,76.41 | v48.06,74.91 48.63,75.48 C33.1
  Bottom 0.254: U3.15 45.17,73.72 45.36,73.91 45.68,73.91 46.32,74.55 47.9,74.55 48.06,74.7 v48.06,74.91 48.63,75.48 C33.1
N$46  (via drill 0.5)
  Top 0.254: R54.1 45.91,74.42 v44.12,74.42
  Bottom 0.254: U3.14 44.52,73.48 44.12,73.89 v44.12,74.42 44.25,74.55 45.36,74.55 46,75.18 46,75.29 C31.1 46.42,75.6
N$47  (via drill 0.5)
  Top 0.254: R83.1 C39.1 48.96,74.61 v49.19,74.84
  Bottom 0.254: U3.16 45.82,73.1 46.63,73.91 48.32,73.91 C39.1 48.96,74.61 v49.19,74.84
N$48
  Bottom 0.254: U3.20 46.47,62.32 46.63,62.48 47.9,62.48 48.96,61.43 C35.1
N$49  (via drill 0.5)
  Top 0.203: v73.94,37.72 75.84,37.72 76.48,37.08 76.48,33.69 R19.2
  Top 0.381: v67.59,37.72 68.22,37.72 68.86,38.35 68.86,39.36 | v67.59,41.53 68.22,41.53 68.86,40.89
  Top 0.406: 68.86,39.36 R28.2 68.86,39.88 68.86,40.89
  Bottom 0.254: U2.10 73.57,37.35 v73.94,37.72
  Bottom 0.381: U2.10 67.96,37.35 v67.59,37.72 | U2.9 67.96,41.9 v67.59,41.53 67.22,41.9 U2.28
N$50  (via drill 0.81)
  Top 0.254: v74.26,47.24 R20.2
  Bottom 0.406: U2.2 73.46,46.45 v74.26,47.24
  Bottom 0.813: TP6.TP 76.16,48.2 75.21,47.24 v74.26,47.24
N$51  (via drill 0.81)
  Top 0.254: v74.26,45.66 74.26,45.34 74.89,44.7 R21.2
  Bottom 0.406: U2.3 74.11,45.8 v74.26,45.66
  Bottom 0.813: v74.26,45.66 TP8.TP
N$52  (via drill 0.5, 0.81)
  Top 0.254: v74.26,36.45 74.99,36.45 R22.2
  Top 0.381: D2.C v67.59,35.81
  Bottom 0.381: U2.12 67.82,36.05 v67.59,35.81
  Bottom 0.406: U2.12 73.54,36.05 v74.26,36.45
  Bottom 0.813: v74.26,36.45 75.21,35.5 TP10.TP
N$53
  Bottom 0.254: U2.5 74.78,44.5 75.63,43.65 R37.1
N$54
  Bottom 0.254: U2.8 73.55,42.55 73.94,42.16 73.94,39.62 74.57,38.99 75.21,38.99 75.63,38.57 R34.1 75.63,37.93
N$55
  Bottom 0.254: U2.33 62.95,45.15 63.14,45.34 63.14,48.51 62.72,48.93 R30.1
N$56
  Bottom 0.254: U2.34 62.33,45.8 62.51,45.97 62.51,47.88 59.97,47.88 59.33,48.51 R27.1
N$57
  Bottom 0.254: U2.7 74.17,43.2 74.57,42.8 74.57,41.21 75.21,40.58 R24.1
N$58
  Bottom 0.254: U2.26 64.16,36.7 64.41,36.45 64.41,35.81 65.05,35.18 65.05,33.91 68.22,30.73 C18.1
N$59
  Bottom 0.254: U2.27 64.78,37.35 65.05,37.08 65.05,36.45 65.68,35.81 65.68,34.54 68.86,31.37 70.13,31.37 70.76,30.73 R42.1
N$60
  Bottom 0.254: U2.30 64.81,43.2 65.05,43.43 65.05,46.61 65.68,47.24 66.95,47.24 67.59,47.88 68.22,47.88 69.28,48.93 R18.1
N$61
  Bottom 0.254: U2.31 64.19,43.85 64.41,44.07 64.41,47.24 65.05,47.88 66.32,47.88 66.95,48.51 R12.1
N$62  (via drill 0.5)
  Top 0.254: v64.41,29.46 65.26,28.61 R10.2
  Bottom 0.254: U2.24 62.92,35.4 63.14,35.18 63.14,34.54 63.78,33.91 63.78,32.64 64.41,32 v64.41,29.46
N$63  (via drill 0.5)
  Top 0.254: v66.95,29.46 66.1,30.31 C10.1
  Bottom 0.254: U2.25 63.54,36.05 63.78,35.81 63.78,35.18 64.41,34.54 64.41,33.27 65.68,32 C10.1 66.1,30.31 v66.95,29.46
N$64
  Bottom 0.254: U2.23 62.3,34.75 62.51,34.54 62.51,33.91 63.14,33.27 C8.1
N$65
  Bottom 0.254: U2.32 63.57,44.5 63.78,44.7 63.78,48.3 R7.1
N$66
  Bottom 0.254: U2.29 65.43,42.55 65.68,42.8 65.68,45.97 66.32,46.61 67.59,46.61 68.22,47.24 68.86,47.24 69.49,47.88 71.4,47.88 72.03,48.51 R8.1
N$67
  Top 0.254: R20.1 R21.1 77.62,44.41 77.62,35.81 R22.1 77.33,35.65 77.65,35.33 77.65,29.36 77.11,28.83 76.69,28.83 R38.2
N$68  (via drill 0.5)
  Top 0.254: v74.83,31.2 75.68,30.57 C14.1
  Bottom 0.254: U2.15 73.75,34.1 73.94,33.91 73.94,33.59 74.65,32.88 74.65,31.7 74.83,31.52 v74.83,31.2 75.68,30.57 C14.1
N$69  (via drill 0.5)
  Top 0.254: v73.94,35.18 73.94,33.69 R19.1
  Bottom 0.254: U2.14 73.51,34.75 v73.94,35.18 74.57,34.54 74.57,33.91 75.21,33.27 75.31,33.27 C12.1 75.63,32.85
N$70  (via drill 0.5)
  Top 0.254: R44.1 73.05,30.31 C20.1 73.32,30.51 73.84,30.51 74.42,29.92 v74.83,29.92
  Bottom 0.254: U2.16 73.13,33.45 73.99,32.59 73.99,31.12 73.44,30.57 R40.1 73.37,30.51 74.02,30.51 74.6,29.92 v74.83,29.92
N$71
  Bottom 0.254: U2.20 62.35,32.8 62.51,32.64 62.51,31.37 61.45,30.31 C16.1
N$72  (via drill 0.5)
  Top 0.203: v37.74,5.33 37.74,3.43 37.11,2.79 33.72,2.79 R59.2
  Top 0.381: v37.74,11.68 37.74,11.05 38.38,10.41 39.39,10.41 | v41.55,11.68 41.55,11.05 40.92,10.41
  Top 0.406: 39.39,10.41 R68.2 39.91,10.41 40.92,10.41
  Bottom 0.254: U4.10 37.37,5.7 v37.74,5.33
  Bottom 0.381: U4.10 37.37,11.31 v37.74,11.68 | U4.9 41.92,11.31 v41.55,11.68 41.92,12.05 U4.28
N$73  (via drill 0.81)
  Top 0.254: v47.27,5.02 R60.2
  Bottom 0.406: U4.2 46.47,5.81 v47.27,5.02
  Bottom 0.813: TP16.TP 48.22,3.11 47.27,4.06 v47.27,5.02
N$74  (via drill 0.81)
  Top 0.254: v45.68,5.02 45.36,5.02 44.73,4.38 R61.2
  Bottom 0.406: U4.3 45.82,5.16 v45.68,5.02
  Bottom 0.813: v45.68,5.02 TP18.TP
N$75  (via drill 0.5, 0.81)
  Top 0.254: v36.47,5.02 36.47,4.28 R62.2
  Top 0.381: D4.C v35.84,11.68
  Bottom 0.381: U4.12 36.07,11.45 v35.84,11.68
  Bottom 0.406: U4.12 36.07,5.73 v36.47,5.02
  Bottom 0.813: v36.47,5.02 35.52,4.06 TP20.TP
N$76
  Bottom 0.254: U4.5 44.52,4.49 43.67,3.64 R77.1
N$77
  Bottom 0.254: U4.8 42.57,5.72 42.19,5.33 39.65,5.33 39.01,4.7 39.01,4.06 38.59,3.64 R74.1 37.96,3.64
N$78
  Bottom 0.254: U4.33 45.17,16.32 45.36,16.13 48.54,16.13 48.96,16.55 R70.1
N$79
  Bottom 0.254: U4.34 45.82,16.94 46,16.76 47.9,16.76 47.9,19.3 48.54,19.94 R67.1
N$80
  Bottom 0.254: U4.7 43.22,5.1 42.82,4.7 41.24,4.7 40.6,4.06 R64.1
N$81
  Bottom 0.254: U4.26 36.72,15.11 36.47,14.86 35.84,14.86 35.2,14.22 33.93,14.22 30.76,11.05 C38.1
N$82
  Bottom 0.254: U4.27 37.37,14.49 37.11,14.22 36.47,14.22 35.84,13.59 34.57,13.59 31.39,10.41 31.39,9.14 30.76,8.51 R82.1
N$83
  Bottom 0.254: U4.30 43.22,14.46 43.46,14.22 46.63,14.22 47.27,13.59 47.27,12.32 47.9,11.68 47.9,11.05 48.96,9.99 R58.1
N$84
  Bottom 0.254: U4.31 43.87,15.08 44.09,14.86 47.27,14.86 47.9,14.22 47.9,12.95 48.54,12.32 R52.1
N$85  (via drill 0.5)
  Top 0.254: v29.49,14.86 28.64,14.01 R50.2
  Bottom 0.254: U4.24 35.42,16.35 35.2,16.13 34.57,16.13 33.93,15.49 32.66,15.49 32.03,14.86 v29.49,14.86
N$86  (via drill 0.5)
  Top 0.254: v29.49,12.32 30.34,13.17 C30.1
  Bottom 0.254: U4.25 36.07,15.73 35.84,15.49 35.2,15.49 34.57,14.86 33.3,14.86 32.03,13.59 C30.1 30.34,13.17 v29.49,12.32
N$87
  Bottom 0.254: U4.23 34.77,16.97 34.57,16.76 33.93,16.76 33.3,16.13 C28.1
N$88
  Bottom 0.254: U4.32 44.52,15.7 44.73,15.49 48.32,15.49 R47.1
N$89
  Bottom 0.254: U4.29 42.57,13.84 42.82,13.59 46,13.59 46.63,12.95 46.63,11.68 47.27,11.05 47.27,10.41 47.9,9.78 47.9,7.87 48.54,7.24 R48.1
N$90
  Top 0.254: R60.1 R61.1 44.51,1.73 36.06,1.73 arc-90 R62.1 35.6,1.94 35.36,1.7 29.31,1.7 28.85,2.16 28.85,2.58 R78.2
N$91  (via drill 0.5)
  Top 0.254: v31.61,4.45 31.61,4.07 R78.1
  Bottom 0.254: U4.15 34.12,5.52 33.93,5.33 33.62,5.33 32.98,4.7 31.9,4.7 v31.61,4.45 31.61,4.07 C34.1
N$92  (via drill 0.5)
  Top 0.254: v35.2,5.33 33.72,5.33 R59.1
  Bottom 0.254: U4.14 34.77,5.76 v35.2,5.33 34.57,4.7 33.93,4.7 33.3,4.06 33.3,3.96 C32.1 32.88,3.64
N$93  (via drill 0.5)
  Top 0.254: R84.1 C40.1 30.34,4.43 v30.32,4.45
  Bottom 0.254: U4.16 33.47,6.14 32.66,5.33 30.97,5.33 C40.1 30.34,4.43 v30.32,4.45
N$94
  Bottom 0.254: U4.20 32.82,16.92 32.66,16.76 31.39,16.76 30.34,17.82 C36.1
N$95
  Top 0.254: 25.76,37.13 33.86,37.13 IC1.8
  Top 0.406: 25.76,37.13 X1.1 25.68,36.73 C44.1
N$96
  Top 0.61: D5.C 35.74,53.61 VR1.3
PC3
  Top 0.254: ICSP1.1 47.57,50.29 41.76,44.48 41.21,44.48 IC1.25
RANGE  (via drill 0.5)
  Top 0.254: IC1.23 41.45,42.01 39.14,39.7 37.59,39.7 v36.73,40.56
  Bottom 0.254: v36.73,40.56 36.73,40.51 32.89,36.68 32.89,29.36 JP3.1
RST  (via drill 0.5)
  Top 0.254: IC1.29 37.85,44.28 37.85,43.31 38.68,42.47 v38.68,41.02
  Bottom 0.254: v38.68,41.02 35.1,37.44 35.1,32.59 36.25,31.45 52.6,31.45 54.18,31.45 55.37,30.25 55.37,28.68 ICSP.5
RX  (via drill 0.5)
  Top 0.254: v47.95,45.59 46.38,44.02 v43.05,44.02 | v37.03,42.62 v37.03,42.63 IC1.30
  Bottom 0.254: ICSP1.5 52.65,50.29 v47.95,45.59 | v43.05,44.02 41.66,42.62 v37.03,42.62
SCK
  Top 0.254: ICSP.3 51,26.92 49.71,28.22 47.64,28.22 47.64,28.25 46.41,29.49 46.41,32.18 42.52,36.07 IC1.17
SCL_MCU
  Top 0.305: JP2.1 26.26,47.3 27.1,46.46 33.78,46.46 36.93,46.46 37.29,46.1 37.29,45.82 37.8,45.31 38.38,45.31 38.63,45.07 IC1.28
SDA_MCU
  Top 0.305: JP2.2 28.8,47.98 29.77,47.02 34.32,47.02 37.24,47.02 37.87,46.38 37.87,46.03 38.05,45.85 39.01,45.85 39.43,45.43 IC1.27
TX  (via drill 0.5)
  Top 0.254: v44.09,45.54 v46.48,45.54
  Top 0.305: v34.27,45.54 34.29,45.57 35.69,45.57 36.23,45.03 IC1.31
  Bottom 0.254: 51.08,50.17 ICSP1.3 51.08,50.14 v46.48,45.54 | v34.27,45.54 v44.09,45.54
V+  (via drill 0.5, 0.6)  (1 unrouted)
  Top 0.203: 9.8,46.29 v9.49,45.97 | 49.49,69.47 49.81,69.79 | v46,69.79 46.32,69.47 | v72.03,29.46 69.81,29.46 69.49,29.78 69.49,32.96 v69.81,33.27 | v29.49,7.24 29.49,9.46 29.81,9.78 32.98,9.78 v33.3,9.46
  Top 0.254: v9.49,45.97 C4.1 | v7.26,49.78 9.49,49.78 9.8,49.47 9.8,46.29 | C24.1 v46,69.79 | 49.81,69.79 v49.81,72.01 | 46.32,69.47 49.49,69.47 | v69.81,33.27 C6.1 | C26.1 v33.3,9.46
  Top 0.381: C3.+ 9.8,34.05 | v10.44,33.27 9.17,32 | 34.07,69.47 C23.+ | v33.3,68.83 32.03,70.1 | C5.+ 69.49,45.2 | v68.86,45.97 70.13,47.24 | C25.+ 45.22,9.78 | v46,10.41 47.27,9.14
  Top 0.61: C42.1 29.88,53.54 29.93,53.59 D5.A 31.71,53.52 v33.55,53.52
  Top 0.813: TP1.TP 19.65,32.15 19.79,32.32 v20.6,32 | TP11.TP 32.17,59.63 32.35,59.48 v32.03,58.67 | TP2.TP 59.65,47.1 59.51,46.93 v58.7,47.24 | TP12.TP 47.12,19.62 46.95,19.77 v47.27,20.57
  Top 1.016: v20.6,32 11.56,32 10.44,32 | v32.03,58.67 32.03,67.82 32.03,68.83 | v58.7,47.24 68.02,47.24 68.86,47.24 | v47.27,20.57 47.27,11.02 47.27,10.41
  Top 1.397: 32.03,67.82 JP10.1 | JP9.1 11.68,31.88 11.56,32 | JP8.1 47.68,11.43 47.27,11.02 | JP11.1 67.82,47.45 68.02,47.24
  Bottom 0.254: U1.17 9.01,46.45 v9.49,45.97 | R39.2 6.41,50.63 v7.26,49.78 | U3.17 46.47,70.26 v46,69.79 | R79.2 50.66,72.86 v49.81,72.01 | U2.17 70.29,32.8 v69.81,33.27 | R40.2 72.88,28.61 v72.03,29.46 | U4.17 32.82,8.99 v33.3,9.46 | R80.2 28.64,6.39 v29.49,7.24
  Bottom 0.381: U1.36 20.45,32.15 v20.6,32 | U1.1 9.31,32.15 v10.44,33.27 | U3.36 32.17,58.82 v32.03,58.67 | U3.1 32.17,69.96 v33.3,68.83 | U2.36 58.84,47.1 v58.7,47.24 | U2.1 69.98,47.1 v68.86,45.97 | U4.36 47.12,20.43 v47.27,20.57 | U4.1 47.12,9.29 v46,10.41
  Bottom 0.813: 31.95,56.84 33.55,56.84 v33.55,53.52
  Bottom 1.397: 56.64,52.22 56.62,27.03 52.25,22.38 46.89,22.38 | 46.89,22.38 47.3,21.97 | 46.79,22.38 27.18,22.38 22.43,27.13 22.43,31.93 | 46.79,22.38 46.89,22.38 | 46.79,22.38 47.27,21.9 v47.27,20.57 | v58.7,47.24 56.92,47.24 56.92,52.25 56.9,52.27 56.9,52.4 51.99,56.84 31.95,56.84 | 22.43,31.93 22.43,52.16 23.43,53.16 22.71,53.16 JP12.2 | v20.6,32 22.35,32 22.43,31.93 | 24.26,52.76 24.26,52.73 25.17,51.82 25.81,51.82 30.94,56.84 31.95,56.84 | v32.03,58.67 32.03,56.92 arc-90 31.95,56.84
  pour Top (no thermals): 11.71,31.37 6.63,31.37 6.63,47.24 11.71,47.24 11.71,44.7 8.53,44.7 8.53,37.08 11.71,37.08
  pour Top (no thermals): 31.39,67.56 31.39,72.64 47.27,72.64 47.27,67.56 44.73,67.56 44.73,70.74 37.11,70.74 37.11,67.56
  pour Top (no thermals): 67.59,47.88 72.67,47.88 72.67,32 67.59,32 67.59,34.54 70.76,34.54 70.76,42.16 67.59,42.16
  pour Top (no thermals): 47.9,11.68 47.9,6.6 32.03,6.6 32.03,11.68 34.57,11.68 34.57,8.51 42.19,8.51 42.19,11.68
V-  (via drill 0.5)  (3 unrouted)
  Top 0.203: v38.06,20.57 39.6,20.57 39.62,20.55
  Top 0.254: C19.2 R43.2 11.18,50.63 11.39,50.42 11.39,49.47 12.34,48.51 12.34,47.37 C4.2 | C19.2 arc90 5.89,50.74 | C39.2 R83.2 50.66,68.1 50.44,67.88 49.49,67.88 48.54,66.93 47.4,66.93 C24.2 | C39.2 arc90 50.76,73.38 | C20.2 arc90 73.41,28.51 | C6.2 66.95,31.87 66.95,30.73 67.91,29.78 67.91,28.83 68.12,28.61 R44.2 71.01,28.37 72.92,28.37 73.28,28.73 C20.2 | C26.2 31.9,12.32 30.76,12.32 29.81,11.37 28.85,11.37 28.64,11.15 R84.2 C40.2 arc90 28.54,5.87 28.99,5.41 v28.99,4.45 | 19.74,39.65 20.6,40.51 v20.6,41.21 20.6,39.7 20.65,39.65 22.89,39.65 22.94,39.6 | v38.06,20.57 38.16,20.47 39.62,20.47 | C20.2 73.33,28.72 v74.83,28.72 | v50.33,74.84 50.66,74.51 C39.2 | v4.38,50.36 5.72,50.36 C19.2
  Top 0.813: 20.6,39.62 v20.6,38.04 | v20.6,41.21 20.6,39.62 | 20.6,39.62 TP3.TP | 39.65,58.67 v38.06,58.67 | 39.65,58.67 v41.24,58.67 | 39.65,58.67 TP13.TP | 58.7,39.62 v58.7,41.21 | 58.7,39.62 v58.7,38.04 | TP4.TP 58.7,39.62 | 39.65,20.57 v41.24,20.57 | v38.06,20.57 39.65,20.57 | 39.65,20.57 TP14.TP
  Top 1.397: TP14.TP 39.68,19.65 | TP4.TP 59.4,39.37 56.74,39.37 | 39.65,56.54 39.65,58.67 | R4.2 52.91,56.41 56.74,52.58 56.74,39.37 | 22.35,39.65 20.65,39.65 19.74,39.65 | 56.74,39.37 56.74,36.91 R2.2 | R3.1 26.63,22.63 L1.P$2 22.94,26.32 22.94,39.6 22.94,43.13 R1.1 | 39.37,22.58 52.7,22.58 56.72,26.59 56.72,33.68 R2.1 | 39.62,20.55 39.62,22.33 39.37,22.58 | 29.9,56.54 39.65,56.54 | 29.9,56.54 29.9,55.96 27.18,53.24 22.71,48.77 R1.2 | 29.9,56.54 27.15,56.54 26.3,56.54 JP12.1 | 39.37,22.58 36.82,22.58 arc-90 R3.2 | 39.65,56.54 42.61,56.54 arc-90 R4.1 | C24.2 46.48,65.05 46.48,63.5 47.17,63.07 50.88,63.07 54.86,67.06 JP6.1 | JP5.1 12.24,54.86 16.23,50.7 16.23,47.12 15.27,45.97 C4.2 | JP4.1 24.38,12.47 28.12,16.21 32.92,16.21 33.27,15.85 33.27,13.74 C26.2 | JP7.1 66.95,24.38 63.07,28.27 63.07,32.87 63.6,33.4 65.43,33.4 C6.2
  Bottom 0.254: C14.2 76.06,28.61 75.96,28.51 75.07,28.51 v74.83,28.72 | v50.33,74.84 C33.2 | C13.2 4.36,50.33 v4.38,50.36 | C34.2 28.97,4.38 v28.99,4.45
  Bottom 0.381: U1.13 10.22,43.85 11.07,44.7 12.34,44.7 12.98,44.07 v12.98,40.26 | U3.13 43.87,69.05 44.73,68.2 44.73,66.93 44.09,66.29 v40.28,66.29 | U2.13 69.08,35.4 68.22,34.54 66.95,34.54 66.32,35.18 v66.32,38.99 | U4.13 35.42,10.19 34.57,11.05 34.57,12.32 35.2,12.95 v39.01,12.95
  other vias: 12.98,38.99 14.25,38.99 14.25,40.26 39.01,66.29 39.01,65.02 40.28,65.02 66.32,40.26 65.05,40.26 65.05,38.99 40.28,12.95 40.28,14.22 39.01,14.22
  pour Bottom (no thermals): 5.99,41.53 20.92,41.53 20.92,37.72 5.99,37.72
  pour Top (no thermals): 12.34,47.24 12.34,33.59 16.79,33.59 16.79,47.24
  pour Bottom (no thermals): 41.55,73.28 41.55,58.36 37.74,58.36 37.74,73.28
  pour Top (no thermals): 47.27,66.93 33.62,66.93 33.62,62.48 47.27,62.48
  pour Bottom (no thermals): 73.3,37.72 58.38,37.72 58.38,41.53 73.3,41.53
  pour Top (no thermals): 66.95,32 66.95,45.66 62.51,45.66 62.51,32
  pour Bottom (no thermals): 37.74,5.97 37.74,20.89 41.55,20.89 41.55,5.97
  pour Top (no thermals): 32.03,12.32 45.68,12.32 45.68,16.76 32.03,16.76
VR1  (via drill 0.5)
  Top 0.254: v16.15,29.46 17.11,28.51 21.23,28.51 21.46,28.74 21.46,35.27 21.23,35.5 18.38,35.5 18.06,35.81 18.06,45.34 18.38,45.66 20.22,45.66 v20.4,45.89
  Bottom 0.254: v16.15,29.46 15.3,28.61 R5.2 R11.2 R13.2 R6.2 7.16,28.51 4.72,28.51 C1.1 | v20.4,45.89 20.48,45.88 U1.21
VR2  (via drill 0.5)
  Top 0.254: v29.49,63.12 28.54,62.17 28.54,58.04 28.85,57.72 35.2,57.72 35.52,58.04 35.52,60.9 35.84,61.21 45.36,61.21 45.68,60.9 v45.71,58.83
  Bottom 0.254: v29.49,63.12 28.64,63.97 R45.2 R51.2 R53.2 R46.2 28.54,72.11 28.54,74.55 C21.1 | v45.71,58.83 45.82,58.82 U3.21
VR3  (via drill 0.5)
  Top 0.254: v63.14,49.78 62.19,50.74 58.06,50.74 57.85,50.47 57.85,44.12 58.06,43.75 60.92,43.75 61.24,43.43 61.24,33.91 60.92,33.59 v58.98,33.59
  Bottom 0.254: v63.14,49.78 63.99,50.63 R7.2 R12.2 R18.2 R8.2 72.14,50.74 74.57,50.74 C2.1 | v58.98,33.59 58.84,33.45 U2.21
VR4  (via drill 0.5)
  Top 0.254: v49.81,16.13 50.76,17.08 50.76,21.21 50.44,21.53 44.09,21.53 43.78,21.21 43.78,18.35 43.46,18.03 33.93,18.03 33.47,18.49 v33.47,20.43
  Bottom 0.254: v49.81,16.13 50.66,15.28 R47.2 R52.2 R58.2 R48.2 50.76,7.14 50.76,4.7 C22.1 | v33.47,20.43 U4.21
WIFI_EN  (via drill 0.5)
  Top 0.254: ICSP1.4 52.38,51.54 52.38,47.04 44.86,39.52 v44.27,39.52 | v37.85,37.08 37.85,35.73 IC1.12
  Bottom 0.254: v44.27,39.52 40.23,39.52 v37.85,37.08
WIFI_IRQ  (via drill 0.5)
  Top 0.254: v35.74,41.83 35.43,42.15 IC1.32 | v44.37,43.26 v46.03,43.26
  Bottom 0.254: ICSP1.6 54.94,51.51 54.94,49.17 54.94,46.66 51.46,43.18 46.05,43.26 v46.03,43.26 | v44.37,43.26 43.13,41.83 v35.74,41.83

## Text on the board
tPlace: - | + | DNP For CW | GND | + | CS | EN | IRQ | - | DNP For CW | PC3 | TX | RX | MAG1 | MAG2 | GND | MAG3 | GND | 5V | MO | GND | DNP For CW | - | MAG4 | GND | MI | SCK | RST | + | DNP For CW | - | +
bPlace: nullspacelabs | charliex | mmca | + | Rev 1.2 | based on design by scolton